# Altium PCB 333.PcbDoc (part 4 of 4)
Units mil, origin at the board's own origin, x right, y up, seen from the top; angles counter-clockwise.
Board outline 3897.64 x 5283.46 mil, 2 copper layers (Top Layer, Bottom Layer); 160 components, 17 nets, 480 pads, 300 vias.
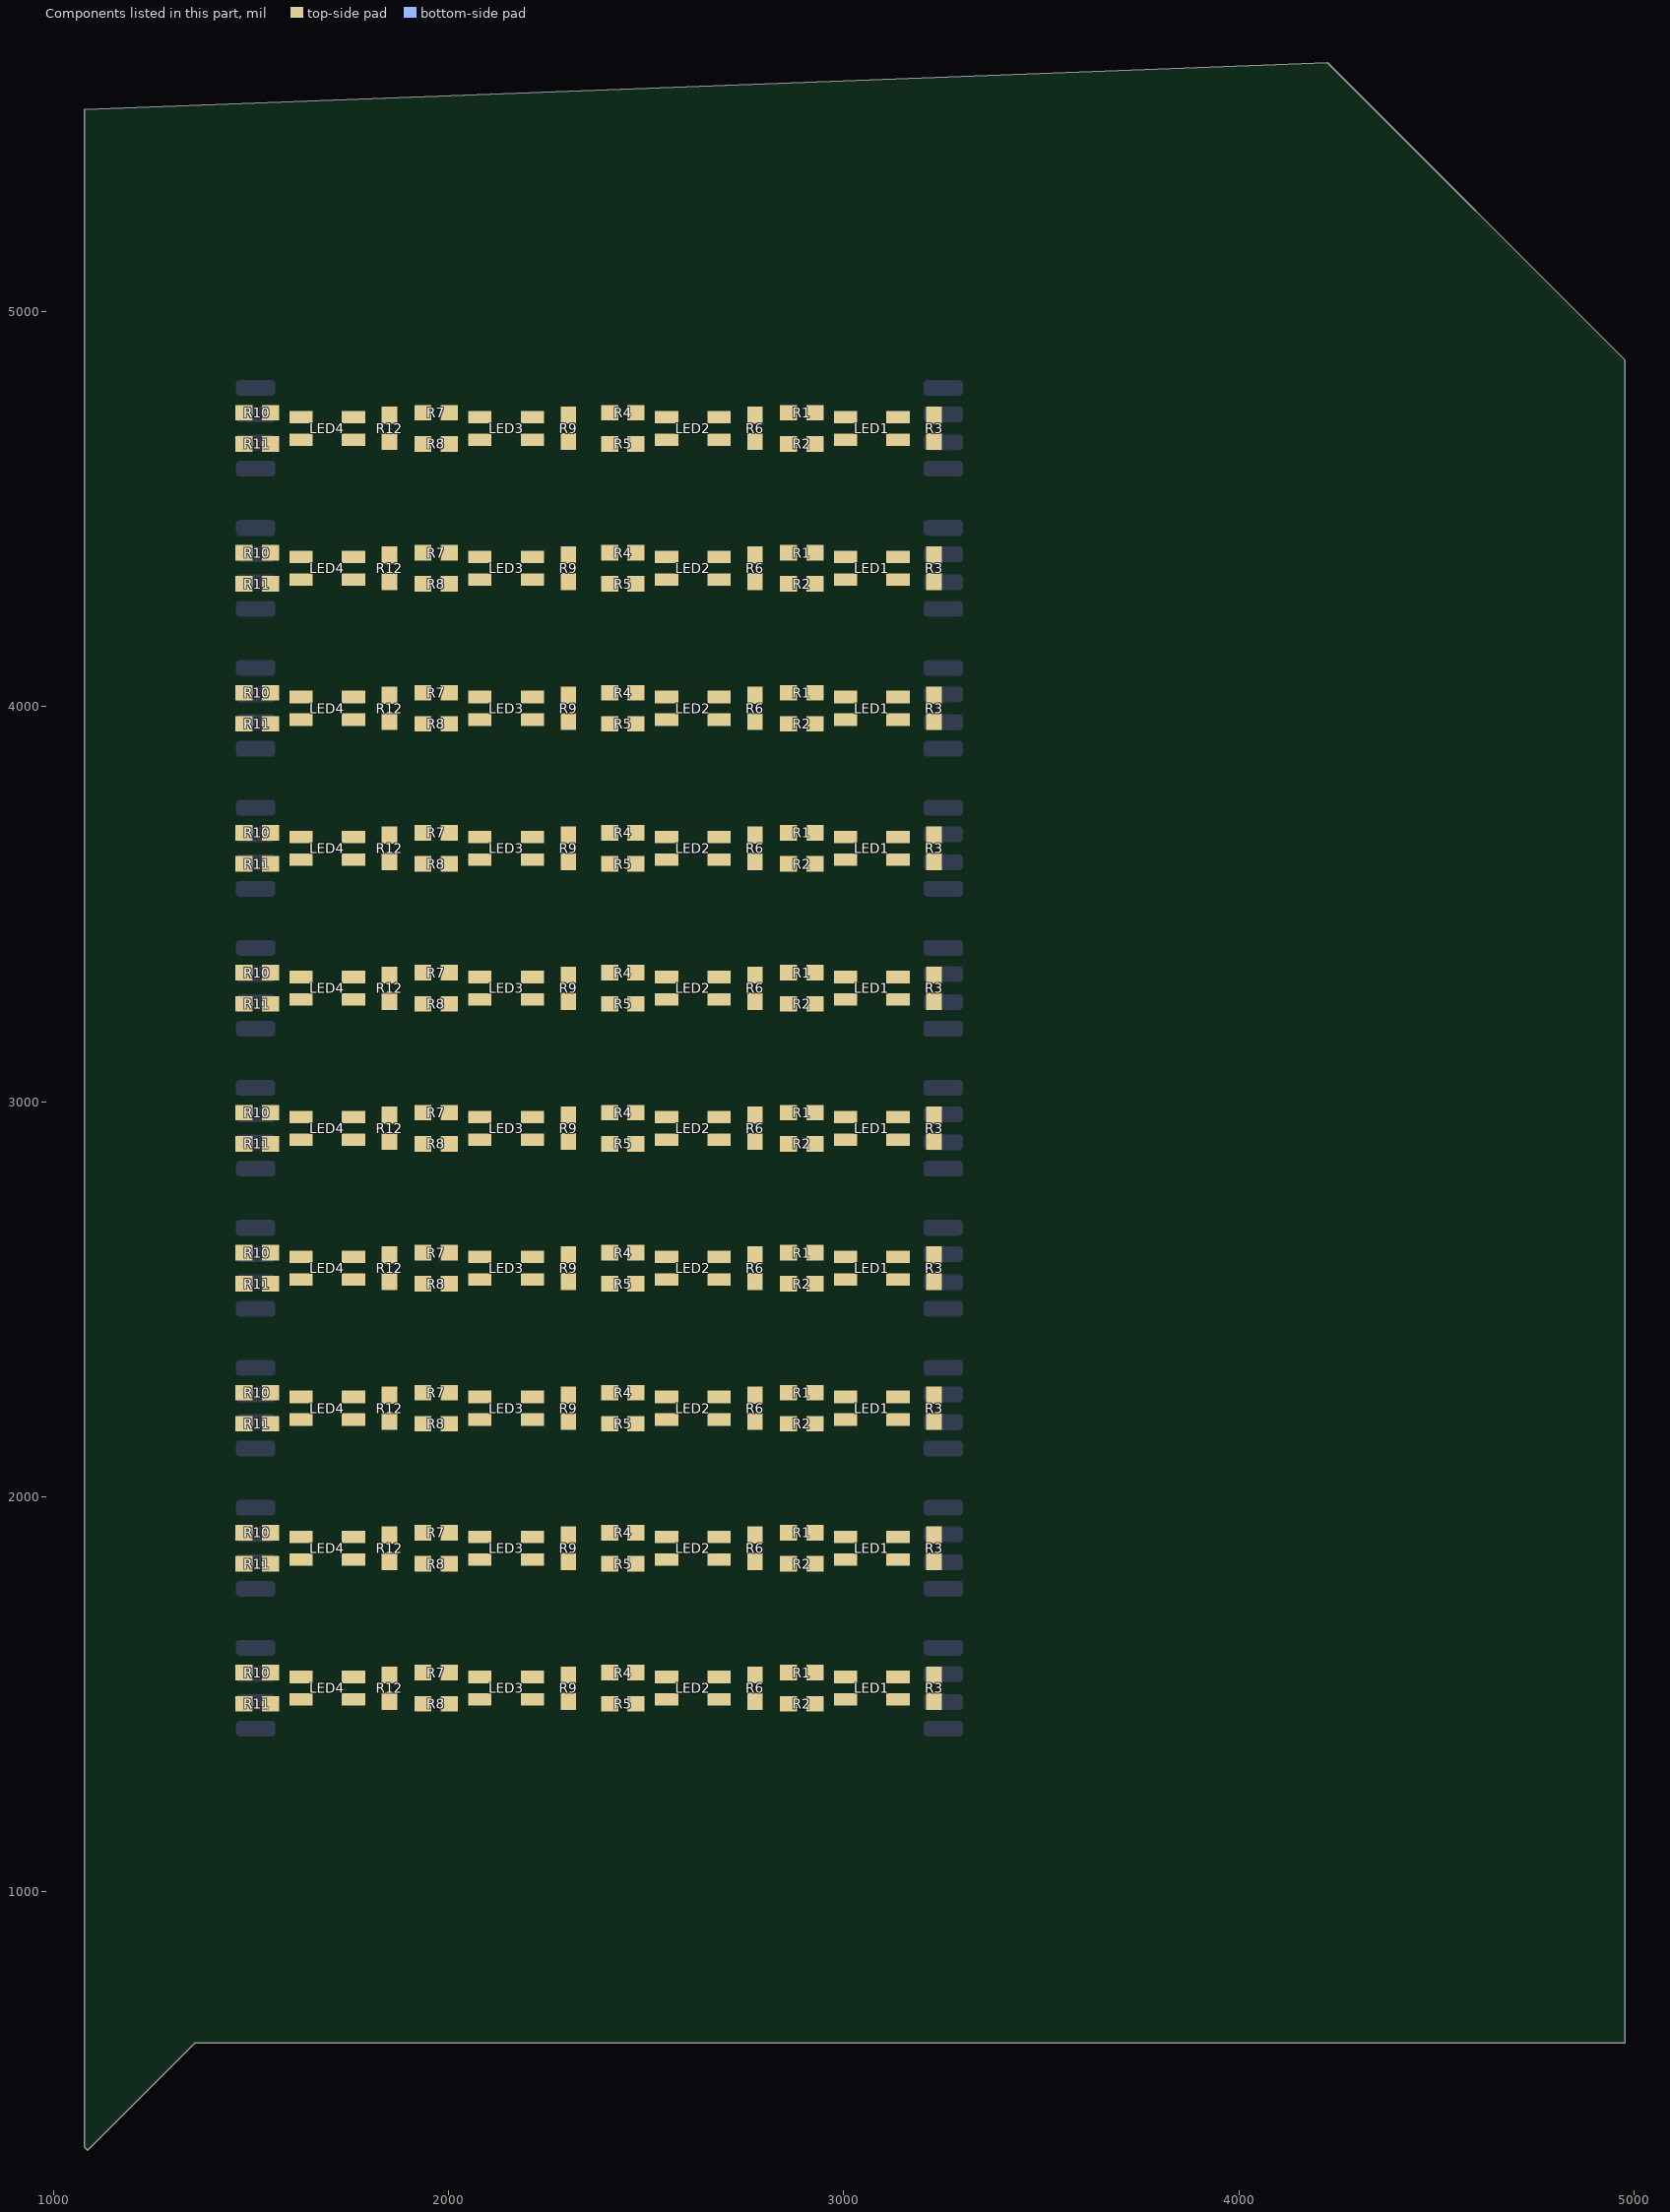
[diagram p4: the components of this part, seen from the top]

## Via types
v1: diameter 24, hole 12, Top Layer to Bottom Layer, 160 vias
v2: diameter 15, hole 15, Top Layer to Bottom Layer, 140 vias

## Nets (pads, with @x,y where several pads share a name; then routed paths per layer and width w, separated by ;. In a path a pad name is that pad's centre, name@x,y a point inside that pad or via, vN(x,y) a via of type N, cw(c..) or ccw(c..) an arc to the next point about the centre after c; other vN are vias at no path point) (continued)
copper on no net: (continued)
  Bottom Layer w20: 1481.81,1413.39 v1(1446.85,1446.85) 1480.32,1413.39 1511.81,1413.39 ; 1481.81,1551.18 v1(1446.85,1525.59) 1472.44,1551.18 1511.81,1551.18 1553.15,1551.18 1578.74,1525.59 ; 1481.81,2122.05 v1(1446.85,2155.51) 1480.32,2122.05 1511.81,2122.05 ; 1481.81,2259.84 v1(1446.85,2234.25) 1472.44,2259.84 1511.81,2259.84 1553.15,2259.84 1578.74,2234.25 ; 1481.81,2476.38 v1(1446.85,2509.84) 1480.32,2476.38 1511.81,2476.38 ; 1481.81,2614.17 v1(1446.85,2588.58) 1472.44,2614.17 1511.81,2614.17 1553.15,2614.17 1578.74,2588.58 ; 1481.81,2830.71 v1(1446.85,2864.17) 1480.32,2830.71 1511.81,2830.71 ; 1481.81,2968.5 v1(1446.85,2942.91) 1472.44,2968.5 1511.81,2968.5 1553.15,2968.5 1578.74,2942.91 ; 1481.81,3185.04 v1(1446.85,3218.5) 1480.32,3185.04 1511.81,3185.04 ; 1481.81,3322.83 v1(1446.85,3297.24) 1472.44,3322.83 1511.81,3322.83 1553.15,3322.83 1578.74,3297.24 ; 1481.81,3539.37 v1(1446.85,3572.83) 1480.32,3539.37 1511.81,3539.37 ; 1481.81,3677.17 v1(1446.85,3651.57) 1472.44,3677.17 1511.81,3677.17 1553.15,3677.17 1578.74,3651.57 ; 1481.81,3893.7 v1(1446.85,3927.17) 1480.32,3893.7 1511.81,3893.7 ; 1481.81,4031.5 v1(1446.85,4005.91) 1472.44,4031.5 1511.81,4031.5 1553.15,4031.5 1578.74,4005.91 ; 1481.81,4248.03 v1(1446.85,4281.5) 1480.32,4248.03 1511.81,4248.03 ; 1481.81,4385.83 v1(1446.85,4360.24) 1472.44,4385.83 1511.81,4385.83 1553.15,4385.83 1578.74,4360.24 ; 1481.81,4602.36 v1(1446.85,4635.83) 1480.32,4602.36 1511.81,4602.36 ; 1481.81,4740.16 v1(1446.85,4714.57) 1472.44,4740.16 1511.81,4740.16 1553.15,4740.16 1578.74,4714.57 ; 1511.81,1480.32 1574.8,1480.32 ; 1511.81,1618.11 1570.87,1618.11 ; 1511.81,2188.98 1574.8,2188.98 ; 1511.81,2326.77 1570.87,2326.77 ; 1511.81,2543.31 1574.8,2543.31 ; 1511.81,2681.1 1570.87,2681.1 ; 1511.81,2897.64 1574.8,2897.64 ; 1511.81,3035.43 1570.87,3035.43 ; 1511.81,3251.97 1574.8,3251.97 ; 1511.81,3389.76 1570.87,3389.76 ; 1511.81,3606.3 1574.8,3606.3 ; 1511.81,3744.09 1570.87,3744.09 ; 1511.81,3960.63 1574.8,3960.63 ; 1511.81,4098.43 1570.87,4098.43 ; 1511.81,4314.96 1574.8,4314.96 ; 1511.81,4452.76 1570.87,4452.76 ; 1511.81,4669.29 1574.8,4669.29 ; 1511.81,4807.09 1570.87,4807.09 ; 1539.37,1409.45 1576.77,1446.85 ; 1539.37,2118.11 1576.77,2155.51 ; 1539.37,2472.44 1576.77,2509.84 ; 1539.37,2826.77 1576.77,2864.17 ; 1539.37,3181.1 1576.77,3218.5 ; 1539.37,3535.43 1576.77,3572.83 ; 1539.37,3889.76 1576.77,3927.17 ; 1539.37,4244.09 1576.77,4281.5 ; 1539.37,4598.43 1576.77,4635.83 ; 1541.81,1413.39 1576.77,1446.85 ; 1541.81,1480.32 1574.8,1480.32 ; 1541.81,1551.18 1578.74,1525.59 ; 1541.81,2122.05 1576.77,2155.51 ; 1541.81,2188.98 1574.8,2188.98 ; 1541.81,2259.84 1578.74,2234.25 ; 1541.81,2476.38 1576.77,2509.84 ; 1541.81,2543.31 1574.8,2543.31 ; 1541.81,2614.17 1578.74,2588.58 ; 1541.81,2830.71 1576.77,2864.17 ; 1541.81,2897.64 1574.8,2897.64 ; 1541.81,2968.5 1578.74,2942.91 ; 1541.81,3185.04 1576.77,3218.5 ; 1541.81,3251.97 1574.8,3251.97 ; 1541.81,3322.83 1578.74,3297.24 ; 1541.81,3539.37 1576.77,3572.83 ; 1541.81,3606.3 1574.8,3606.3 ; 1541.81,3677.17 1578.74,3651.57 ; 1541.81,3893.7 1576.77,3927.17 ; 1541.81,3960.63 1574.8,3960.63 ; 1541.81,4031.5 1578.74,4005.91 ; 1541.81,4248.03 1576.77,4281.5 ; 1541.81,4314.96 1574.8,4314.96 ; 1541.81,4385.83 1578.74,4360.24 ; 1541.81,4602.36 1576.77,4635.83 ; 1541.81,4669.29 1574.8,4669.29 ; 1541.81,4740.16 1578.74,4714.57 ; 3194.71,1480.32 v1(3267.72,1486.22) 3251.97,1480.32 3188.98,1480.32 ; 3194.71,2188.98 v1(3267.72,2194.88) 3251.97,2188.98 3188.98,2188.98 ; 3194.71,2543.31 v1(3267.72,2549.21) 3251.97,2543.31 3188.98,2543.31 ; 3194.71,2897.64 v1(3267.72,2903.54) 3251.97,2897.64 3188.98,2897.64 ; 3194.71,3251.97 v1(3267.72,3257.87) 3251.97,3251.97 3188.98,3251.97 ; 3194.71,3606.3 v1(3267.72,3612.2) 3251.97,3606.3 3188.98,3606.3 ; 3194.71,3960.63 v1(3267.72,3966.54) 3251.97,3960.63 3188.98,3960.63 ; 3194.71,4314.96 v1(3267.72,4320.87) 3251.97,4314.96 3188.98,4314.96 ; 3194.71,4669.29 v1(3267.72,4675.2) 3251.97,4669.29 3188.98,4669.29 ; 3221.97,1480.32 3188.98,1480.32 ; 3221.97,2188.98 3188.98,2188.98 ; 3221.97,2543.31 3188.98,2543.31 ; 3221.97,2897.64 3188.98,2897.64 ; 3221.97,3251.97 3188.98,3251.97 ; 3221.97,3606.3 3188.98,3606.3 ; 3221.97,3960.63 3188.98,3960.63 ; 3221.97,4314.96 3188.98,4314.96 ; 3221.97,4669.29 3188.98,4669.29 ; 3251.97,1413.39 3196.85,1413.39 ; 3251.97,1551.18 3196.85,1551.18 ; 3251.97,1618.11 3192.91,1618.11 ; 3251.97,2122.05 3196.85,2122.05 ; 3251.97,2259.84 3196.85,2259.84 ; 3251.97,2326.77 3192.91,2326.77 ; 3251.97,2476.38 3196.85,2476.38 ; 3251.97,2614.17 3196.85,2614.17 ; 3251.97,2681.1 3192.91,2681.1 ; 3251.97,2830.71 3196.85,2830.71 ; 3251.97,2968.5 3196.85,2968.5 ; 3251.97,3035.43 3192.91,3035.43 ; 3251.97,3185.04 3196.85,3185.04 ; 3251.97,3322.83 3196.85,3322.83 ; 3251.97,3389.76 3192.91,3389.76 ; 3251.97,3539.37 3196.85,3539.37 ; 3251.97,3677.17 3196.85,3677.17 ; 3251.97,3744.09 3192.91,3744.09 ; 3251.97,3893.7 3196.85,3893.7 ; 3251.97,4031.5 3196.85,4031.5 ; 3251.97,4098.43 3192.91,4098.43 ; 3251.97,4248.03 3196.85,4248.03 ; 3251.97,4385.83 3196.85,4385.83 ; 3251.97,4452.76 3192.91,4452.76 ; 3251.97,4602.36 3196.85,4602.36 ; 3251.97,4740.16 3196.85,4740.16 ; 3251.97,4807.09 3192.91,4807.09 ; 1541.81,1618.11 1570.87,1618.11 ; 1541.81,1618.11 1614.17,1574.8 ; 1541.81,1618.11 1570.87,1618.11 ; 1541.81,2326.77 1570.87,2326.77 ; 1541.81,2326.77 1614.17,2283.46 ; 1541.81,2326.77 1570.87,2326.77 ; 1541.81,2681.1 1570.87,2681.1 ; 1541.81,2681.1 1614.17,2637.8 ; 1541.81,2681.1 1570.87,2681.1 ; 1541.81,3035.43 1570.87,3035.43 ; 1541.81,3035.43 1614.17,2992.13 ; 1541.81,3035.43 1570.87,3035.43 ; 1541.81,3389.76 1570.87,3389.76 ; 1541.81,3389.76 1614.17,3346.46 ; 1541.81,3389.76 1570.87,3389.76 ; 1541.81,3744.09 1570.87,3744.09 ; 1541.81,3744.09 1614.17,3700.79 ; 1541.81,3744.09 1570.87,3744.09 ; 1541.81,4098.43 1570.87,4098.43 ; 1541.81,4098.43 1614.17,4055.12 ; 1541.81,4098.43 1570.87,4098.43 ; 1541.81,4452.76 1570.87,4452.76 ; 1541.81,4452.76 1614.17,4409.45 ; 1541.81,4452.76 1570.87,4452.76 ; 1541.81,4807.09 1570.87,4807.09 ; 1541.81,4807.09 1614.17,4763.78 ; 1541.81,4807.09 1570.87,4807.09 ; 1570.87,1618.11 1614.17,1574.8 ; 1570.87,2326.77 1614.17,2283.46 ; 1570.87,2681.1 1614.17,2637.8 ; 1570.87,3035.43 1614.17,2992.13 ; 1570.87,3389.76 1614.17,3346.46 ; 1570.87,3744.09 1614.17,3700.79 ; 1570.87,4098.43 1614.17,4055.12 ; 1570.87,4452.76 1614.17,4409.45 ; 1570.87,4807.09 1614.17,4763.78 ; 1574.8,1480.32 1580.71,1486.22 v1(1889.76,1486.22) v1(2342.52,1486.22) v1(2814.96,1486.22) 3183.07,1486.22 3188.98,1480.32 ; 1574.8,2188.98 1580.71,2194.88 v1(1889.76,2194.88) v1(2342.52,2194.88) v1(2814.96,2194.88) 3183.07,2194.88 3188.98,2188.98 ; 1574.8,2543.31 1580.71,2549.21 v1(1889.76,2549.21) v1(2342.52,2549.21) v1(2814.96,2549.21) 3183.07,2549.21 3188.98,2543.31 ; 1574.8,2897.64 1580.71,2903.54 v1(1889.76,2903.54) v1(2342.52,2903.54) v1(2814.96,2903.54) 3183.07,2903.54 3188.98,2897.64 ; 1574.8,3251.97 1580.71,3257.87 v1(1889.76,3257.87) v1(2342.52,3257.87) v1(2814.96,3257.87) 3183.07,3257.87 3188.98,3251.97 ; 1574.8,3606.3 1580.71,3612.2 v1(1889.76,3612.2) v1(2342.52,3612.2) v1(2814.96,3612.2) 3183.07,3612.2 3188.98,3606.3 ; 1574.8,3960.63 1580.71,3966.54 v1(1889.76,3966.54) v1(2342.52,3966.54) v1(2814.96,3966.54) 3183.07,3966.54 3188.98,3960.63 ; 1574.8,4314.96 1580.71,4320.87 v1(1889.76,4320.87) v1(2342.52,4320.87) v1(2814.96,4320.87) 3183.07,4320.87 3188.98,4314.96 ; 1574.8,4669.29 1580.71,4675.2 v1(1889.76,4675.2) v1(2342.52,4675.2) v1(2814.96,4675.2) 3183.07,4675.2 3188.98,4669.29 ; 1576.77,1446.85 v1(1899.61,1446.85) v1(2372.05,1446.85) v1(2824.8,1446.85) 3163.39,1446.85 ; 1576.77,2155.51 v1(1899.61,2155.51) v1(2372.05,2155.51) v1(2824.8,2155.51) 3163.39,2155.51 ; 1576.77,2509.84 v1(1899.61,2509.84) v1(2372.05,2509.84) v1(2824.8,2509.84) 3163.39,2509.84 ; 1576.77,2864.17 v1(1899.61,2864.17) v1(2372.05,2864.17) v1(2824.8,2864.17) 3163.39,2864.17 ; 1576.77,3218.5 v1(1899.61,3218.5) v1(2372.05,3218.5) v1(2824.8,3218.5) 3163.39,3218.5 ; 1576.77,3572.83 v1(1899.61,3572.83) v1(2372.05,3572.83) v1(2824.8,3572.83) 3163.39,3572.83 ; 1576.77,3927.17 v1(1899.61,3927.17) v1(2372.05,3927.17) v1(2824.8,3927.17) 3163.39,3927.17 ; 1576.77,4281.5 v1(1899.61,4281.5) v1(2372.05,4281.5) v1(2824.8,4281.5) 3163.39,4281.5 ; 1576.77,4635.83 v1(1899.61,4635.83) v1(2372.05,4635.83) v1(2824.8,4635.83) 3163.39,4635.83 ; 1578.74,1525.59 v1(1899.61,1525.59) v1(2372.05,1525.59) v1(2824.8,1525.59) 3171.26,1525.59 ; 1578.74,2234.25 v1(1899.61,2234.25) v1(2372.05,2234.25) v1(2824.8,2234.25) 3171.26,2234.25 ; 1578.74,2588.58 v1(1899.61,2588.58) v1(2372.05,2588.58) v1(2824.8,2588.58) 3171.26,2588.58 ; 1578.74,2942.91 v1(1899.61,2942.91) v1(2372.05,2942.91) v1(2824.8,2942.91) 3171.26,2942.91 ; 1578.74,3297.24 v1(1899.61,3297.24) v1(2372.05,3297.24) v1(2824.8,3297.24) 3171.26,3297.24 ; 1578.74,3651.57 v1(1899.61,3651.57) v1(2372.05,3651.57) v1(2824.8,3651.57) 3171.26,3651.57 ; 1578.74,4005.91 v1(1899.61,4005.91) v1(2372.05,4005.91) v1(2824.8,4005.91) 3171.26,4005.91 ; 1578.74,4360.24 v1(1899.61,4360.24) v1(2372.05,4360.24) v1(2824.8,4360.24) 3171.26,4360.24 ; 1578.74,4714.57 v1(1899.61,4714.57) v1(2372.05,4714.57) v1(2824.8,4714.57) 3171.26,4714.57 ; 1614.17,1574.8 v1(1702.76,1574.8) v1(2155.51,1574.8) v1(2627.95,1574.8) v1(3080.71,1574.8) 3149.61,1574.8 ; 1614.17,2283.46 v1(1702.76,2283.46) v1(2155.51,2283.46) v1(2627.95,2283.46) v1(3080.71,2283.46) 3149.61,2283.46 ; 1614.17,2637.8 v1(1702.76,2637.8) v1(2155.51,2637.8) v1(2627.95,2637.8) v1(3080.71,2637.8) 3149.61,2637.8 ; 1614.17,2992.13 v1(1702.76,2992.13) v1(2155.51,2992.13) v1(2627.95,2992.13) v1(3080.71,2992.13) 3149.61,2992.13 ; 1614.17,3346.46 v1(1702.76,3346.46) v1(2155.51,3346.46) v1(2627.95,3346.46) v1(3080.71,3346.46) 3149.61,3346.46 ; 1614.17,3700.79 v1(1702.76,3700.79) v1(2155.51,3700.79) v1(2627.95,3700.79) v1(3080.71,3700.79) 3149.61,3700.79 ; 1614.17,4055.12 v1(1702.76,4055.12) v1(2155.51,4055.12) v1(2627.95,4055.12) v1(3080.71,4055.12) 3149.61,4055.12 ; 1614.17,4409.45 v1(1702.76,4409.45) v1(2155.51,4409.45) v1(2627.95,4409.45) v1(3080.71,4409.45) 3149.61,4409.45 ; 1614.17,4763.78 v1(1702.76,4763.78) v1(2155.51,4763.78) v1(2627.95,4763.78) v1(3080.71,4763.78) 3149.61,4763.78 ; 3149.61,1574.8 3192.91,1618.11 ; 3149.61,1574.8 3221.97,1618.11 ; 3149.61,2283.46 3221.97,2326.77 ; 3149.61,2283.46 3192.91,2326.77 ; 3149.61,2637.8 3192.91,2681.1 ; 3149.61,2637.8 3221.97,2681.1 ; 3149.61,2992.13 3221.97,3035.43 ; 3149.61,2992.13 3192.91,3035.43 ; 3149.61,3346.46 3192.91,3389.76 ; 3149.61,3346.46 3221.97,3389.76 ; 3149.61,3700.79 3192.91,3744.09 ; 3149.61,3700.79 3221.97,3744.09 ; 3149.61,4055.12 3221.97,4098.43 ; 3149.61,4055.12 3192.91,4098.43 ; 3149.61,4409.45 3221.97,4452.76 ; 3149.61,4409.45 3192.91,4452.76 ; 3149.61,4763.78 3192.91,4807.09 ; 3149.61,4763.78 3221.97,4807.09 ; 3163.39,1446.85 3196.85,1413.39 ; 3163.39,1446.85 3221.97,1413.39 ; 3163.39,2155.51 3221.97,2122.05 ; 3163.39,2155.51 3196.85,2122.05 ; 3163.39,2509.84 3196.85,2476.38 ; 3163.39,2509.84 3221.97,2476.38 ; 3163.39,2864.17 3221.97,2830.71 ; 3163.39,2864.17 3196.85,2830.71 ; 3163.39,3218.5 3196.85,3185.04 ; 3163.39,3218.5 3221.97,3185.04 ; 3163.39,3572.83 3196.85,3539.37 ; 3163.39,3572.83 3221.97,3539.37 ; 3163.39,3927.17 3221.97,3893.7 ; 3163.39,3927.17 3196.85,3893.7 ; 3163.39,4281.5 3221.97,4248.03 ; 3163.39,4281.5 3196.85,4248.03 ; 3163.39,4635.83 3196.85,4602.36 ; 3163.39,4635.83 3221.97,4602.36 ; 3171.26,1525.59 3196.85,1551.18 ; 3171.26,1525.59 3221.97,1551.18 ; 3171.26,2234.25 3221.97,2259.84 ; 3171.26,2234.25 3196.85,2259.84 ; 3171.26,2588.58 3196.85,2614.17 ; 3171.26,2588.58 3221.97,2614.17 ; 3171.26,2942.91 3221.97,2968.5 ; 3171.26,2942.91 3196.85,2968.5 ; 3171.26,3297.24 3196.85,3322.83 ; 3171.26,3297.24 3221.97,3322.83 ; 3171.26,3651.57 3196.85,3677.17 ; 3171.26,3651.57 3221.97,3677.17 ; 3171.26,4005.91 3221.97,4031.5 ; 3171.26,4005.91 3196.85,4031.5 ; 3171.26,4360.24 3221.97,4385.83 ; 3171.26,4360.24 3196.85,4385.83 ; 3171.26,4714.57 3196.85,4740.16 ; 3171.26,4714.57 3221.97,4740.16 ; 3192.91,1618.11 3221.97,1618.11 ; 3192.91,1618.11 3221.97,1618.11 ; 3192.91,2326.77 3221.97,2326.77 ; 3192.91,2326.77 3221.97,2326.77 ; 3192.91,2681.1 3221.97,2681.1 ; 3192.91,2681.1 3221.97,2681.1 ; 3192.91,3035.43 3221.97,3035.43 ; 3192.91,3035.43 3221.97,3035.43 ; 3192.91,3389.76 3221.97,3389.76 ; 3192.91,3389.76 3221.97,3389.76 ; 3192.91,3744.09 3221.97,3744.09 ; 3192.91,3744.09 3221.97,3744.09 ; 3192.91,4098.43 3221.97,4098.43 ; 3192.91,4098.43 3221.97,4098.43 ; 3192.91,4452.76 3221.97,4452.76 ; 3192.91,4452.76 3221.97,4452.76 ; 3192.91,4807.09 3221.97,4807.09 ; 3192.91,4807.09 3221.97,4807.09 ; 3196.85,1413.39 3221.97,1413.39 ; 3196.85,1413.39 3221.97,1413.39 ; 3196.85,1551.18 3221.97,1551.18 ; 3196.85,1551.18 3221.97,1551.18 ; 3196.85,2122.05 3221.97,2122.05 ; 3196.85,2122.05 3221.97,2122.05 ; 3196.85,2259.84 3221.97,2259.84 ; 3196.85,2259.84 3221.97,2259.84 ; 3196.85,2476.38 3221.97,2476.38 ; 3196.85,2476.38 3221.97,2476.38 ; 3196.85,2614.17 3221.97,2614.17 ; 3196.85,2614.17 3221.97,2614.17 ; 3196.85,2830.71 3221.97,2830.71 ; 3196.85,2830.71 3221.97,2830.71 ; 3196.85,2968.5 3221.97,2968.5 ; 3196.85,2968.5 3221.97,2968.5 ; 3196.85,3185.04 3221.97,3185.04 ; 3196.85,3185.04 3221.97,3185.04 ; 3196.85,3322.83 3221.97,3322.83 ; 3196.85,3322.83 3221.97,3322.83 ; 3196.85,3539.37 3221.97,3539.37 ; 3196.85,3539.37 3221.97,3539.37 ; 3196.85,3677.17 3221.97,3677.17 ; 3196.85,3677.17 3221.97,3677.17 ; 3196.85,3893.7 3221.97,3893.7 ; 3196.85,3893.7 3221.97,3893.7 ; 3196.85,4031.5 3221.97,4031.5 ; 3196.85,4031.5 3221.97,4031.5 ; 3196.85,4248.03 3221.97,4248.03 ; 3196.85,4248.03 3221.97,4248.03 ; 3196.85,4385.83 3221.97,4385.83 ; 3196.85,4385.83 3221.97,4385.83 ; 3196.85,4602.36 3221.97,4602.36 ; 3196.85,4602.36 3221.97,4602.36 ; 3196.85,4740.16 3221.97,4740.16 ; 3196.85,4740.16 3221.97,4740.16
  other v2: 1417.32,1456.69 3346.46,1456.69 1417.32,1476.38 3346.46,1476.38 1417.32,1496.06 3346.46,1496.06 1417.32,1515.75 3346.46,1515.75 1417.32,1535.43 3346.46,1535.43 1417.32,1555.12 3346.46,1555.12 1417.32,1574.8 3346.46,1574.8 1417.32,1811.02 3346.46,1811.02 1417.32,1830.71 3346.46,1830.71 1417.32,1850.39 3346.46,1850.39 1417.32,1870.08 3346.46,1870.08 1417.32,1889.76 3346.46,1889.76 1417.32,1909.45 3346.46,1909.45 1417.32,1929.13 3346.46,1929.13 1417.32,2165.35 3346.46,2165.35 1417.32,2185.04 3346.46,2185.04 1417.32,2204.72 3346.46,2204.72 1417.32,2224.41 3346.46,2224.41 1417.32,2244.09 3346.46,2244.09 1417.32,2263.78 3346.46,2263.78 1417.32,2283.46 3346.46,2283.46 1417.32,2519.69 3346.46,2519.68 1417.32,2539.37 3346.46,2539.37 1417.32,2559.06 3346.46,2559.06 1417.32,2578.74 3346.46,2578.74 1417.32,2598.43 3346.46,2598.43 1417.32,2618.11 3346.46,2618.11 1417.32,2637.8 3346.46,2637.8 1417.32,2874.02 3346.46,2874.02 1417.32,2893.7 3346.46,2893.7 1417.32,2913.39 3346.46,2913.39 1417.32,2933.07 3346.46,2933.07 1417.32,2952.76 3346.46,2952.76 1417.32,2972.44 3346.46,2972.44 1417.32,2992.13 3346.46,2992.13 1417.32,3228.35 3346.46,3228.35 1417.32,3248.03 3346.46,3248.03 1417.32,3267.72 3346.46,3267.72 1417.32,3287.4 3346.46,3287.4 1417.32,3307.09 3346.46,3307.09 1417.32,3326.77 3346.46,3326.77 1417.32,3346.46 3346.46,3346.46 1417.32,3582.68 3346.46,3582.68 1417.32,3602.36 3346.46,3602.36 1417.32,3622.05 3346.46,3622.05 1417.32,3641.73 3346.46,3641.73 1417.32,3661.42 3346.46,3661.42 1417.32,3681.1 3346.46,3681.1 1417.32,3700.79 3346.46,3700.79 1417.32,3937.01 3346.46,3937.01 1417.32,3956.69 3346.46,3956.69 1417.32,3976.38 3346.46,3976.38 1417.32,3996.06 3346.46,3996.06 1417.32,4015.75 3346.46,4015.75 1417.32,4035.43 3346.46,4035.43 1417.32,4055.12 3346.46,4055.12 1417.32,4291.34 3346.46,4291.34 1417.32,4311.02 3346.46,4311.02 1417.32,4330.71 3346.46,4330.71 1417.32,4350.39 3346.46,4350.39 1417.32,4370.08 3346.46,4370.08 1417.32,4389.76 3346.46,4389.76 1417.32,4409.45 3346.46,4409.45 1417.32,4645.67 3346.46,4645.67 1417.32,4665.35 3346.46,4665.35 1417.32,4685.04 3346.46,4685.04 1417.32,4704.72 3346.46,4704.72 1417.32,4724.41 3346.46,4724.41 1417.32,4744.09 3346.46,4744.09 1417.32,4763.78 3346.46,4763.78

## Keep-outs
Keep-Out Layer:
  lines w10: 1259.84,1259.84 1259.84,1338.58 1259.84,4960.63 3503.94,4960.63 3503.94,1259.84 3484.25,1259.84 1259.84,1259.84 ; 1358.27,1338.58 1358.27,1456.69 1417.32,1456.69 1417.32,1377.95 1574.8,1377.95 1614.17,1417.32 3149.61,1417.32 3188.98,1377.95 3346.46,1377.95 3346.46,1456.69 3405.51,1456.69 3405.51,1338.58 1358.27,1338.58 ; 1358.27,1574.8 1358.27,1692.91 1358.27,1811.02 1417.32,1811.02 1417.32,1732.28 1574.8,1732.28 1614.17,1771.65 3149.61,1771.65 3188.98,1732.28 3346.46,1732.28 3346.46,1811.02 3405.51,1811.02 3405.51,1692.91 3405.51,1574.8 3346.46,1574.8 3346.46,1653.54 3188.98,1653.54 3149.61,1614.17 1614.17,1614.17 1574.8,1653.54 1417.32,1653.54 1417.32,1574.8 1358.27,1574.8 ; 1358.27,1929.13 1358.27,2047.24 1358.27,2165.35 1417.32,2165.35 1417.32,2086.61 1574.8,2086.61 1614.17,2125.98 3149.61,2125.98 3188.98,2086.61 3346.46,2086.61 3346.46,2165.35 3405.51,2165.35 3405.51,2047.24 3405.51,1929.13 3346.46,1929.13 3346.46,2007.87 3188.98,2007.87 3149.61,1968.5 1614.17,1968.5 1574.8,2007.87 1417.32,2007.87 1417.32,1929.13 1358.27,1929.13 ; 1358.27,2283.46 1358.27,2401.57 1358.27,2519.69 1417.32,2519.69 1417.32,2440.94 1574.8,2440.94 1614.17,2480.32 3149.61,2480.32 3188.98,2440.94 3346.46,2440.94 3346.46,2519.68 3405.51,2519.68 3405.51,2401.57 3405.51,2283.46 3346.46,2283.46 3346.46,2362.2 3188.98,2362.2 3149.61,2322.83 1614.17,2322.83 1574.8,2362.2 1417.32,2362.2 1417.32,2283.46 1358.27,2283.46 ; 1358.27,2637.8 1358.27,2755.91 1358.27,2874.02 1417.32,2874.02 1417.32,2795.28 1574.8,2795.28 1614.17,2834.65 3149.61,2834.65 3188.98,2795.28 3346.46,2795.28 3346.46,2874.02 3405.51,2874.02 3405.51,2755.91 3405.51,2637.8 3346.46,2637.8 3346.46,2716.54 3188.98,2716.54 3149.61,2677.17 1614.17,2677.17 1574.8,2716.54 1417.32,2716.54 1417.32,2637.8 1358.27,2637.8 ; 1358.27,2992.13 1358.27,3110.24 1358.27,3228.35 1417.32,3228.35 1417.32,3149.61 1574.8,3149.61 1614.17,3188.98 3149.61,3188.98 3188.98,3149.61 3346.46,3149.61 3346.46,3228.35 3405.51,3228.35 3405.51,3110.24 3405.51,2992.13 3346.46,2992.13 3346.46,3070.87 3188.98,3070.87 3149.61,3031.5 1614.17,3031.5 1574.8,3070.87 1417.32,3070.87 1417.32,2992.13 1358.27,2992.13 ; 1358.27,3346.46 1358.27,3464.57 1358.27,3582.68 1417.32,3582.68 1417.32,3503.94 1574.8,3503.94 1614.17,3543.31 3149.61,3543.31 3188.98,3503.94 3346.46,3503.94 3346.46,3582.68 3405.51,3582.68 3405.51,3464.57 3405.51,3346.46 3346.46,3346.46 3346.46,3425.2 3188.98,3425.2 3149.61,3385.83 1614.17,3385.83 1574.8,3425.2 1417.32,3425.2 1417.32,3346.46 1358.27,3346.46 ; 1358.27,3700.79 1358.27,3818.9 1358.27,3937.01 1417.32,3937.01 1417.32,3858.27 1574.8,3858.27 1614.17,3897.64 3149.61,3897.64 3188.98,3858.27 3346.46,3858.27 3346.46,3937.01 3405.51,3937.01 3405.51,3818.9 3405.51,3700.79 3346.46,3700.79 3346.46,3779.53 3188.98,3779.53 3149.61,3740.16 1614.17,3740.16 1574.8,3779.53 1417.32,3779.53 1417.32,3700.79 1358.27,3700.79 ; 1358.27,4055.12 1358.27,4173.23 1358.27,4291.34 1417.32,4291.34 1417.32,4212.6 1574.8,4212.6 1614.17,4251.97 3149.61,4251.97 3188.98,4212.6 3346.46,4212.6 3346.46,4291.34 3405.51,4291.34 3405.51,4173.23 3405.51,4055.12 3346.46,4055.12 3346.46,4133.86 3188.98,4133.86 3149.61,4094.49 1614.17,4094.49 1574.8,4133.86 1417.32,4133.86 1417.32,4055.12 1358.27,4055.12 ; 1358.27,4409.45 1358.27,4527.56 1358.27,4645.67 1417.32,4645.67 1417.32,4566.93 1574.8,4566.93 1614.17,4606.3 3149.61,4606.3 3188.98,4566.93 3346.46,4566.93 3346.46,4645.67 3405.51,4645.67 3405.51,4527.56 3405.51,4409.45 3346.46,4409.45 3346.46,4488.19 3188.98,4488.19 3149.61,4448.82 1614.17,4448.82 1574.8,4488.19 1417.32,4488.19 1417.32,4409.45 1358.27,4409.45 ; 1358.27,4763.78 1417.32,4763.78 1417.32,4842.52 1574.8,4842.52 1614.17,4803.15 3149.61,4803.15 3188.98,4842.52 3346.46,4842.52 3346.46,4763.78 3405.51,4763.78 3405.51,4881.89 1358.27,4881.89 1358.27,4763.78

## Silkscreen, mask and mechanical layers (free items; w line width, h text height)
Top Overlay:
  text "JICJICJICJIC" at 1322.83,2972.44 h40 r90
Bottom Overlay:
  text "+" at 1629.92,4755.91 h40
  text "+" at 3114.17,4755.91 h40
  text "R" at 1622.05,4740.16 h40 r270
  text "R" at 3106.3,4740.16 h40 r270
  text "B" at 1622.05,4692.91 h40 r270
  text "B" at 3106.3,4692.91 h40 r270
  text "G" at 1622.05,4645.67 h40 r270
  text "G" at 3106.3,4645.67 h40 r270
  text "+" at 1629.92,4401.57 h40
  text "+" at 3114.17,4401.57 h40
  text "R" at 1622.05,4385.83 h40 r270
  text "R" at 3106.3,4385.83 h40 r270
  text "B" at 1622.05,4338.58 h40 r270
  text "B" at 3106.3,4338.58 h40 r270
  text "G" at 1622.05,4291.34 h40 r270
  text "G" at 3106.3,4291.34 h40 r270
  text "+" at 1629.92,4047.24 h40
  text "+" at 3114.17,4047.24 h40
  text "R" at 1622.05,4031.5 h40 r270
  text "R" at 3106.3,4031.5 h40 r270
  text "B" at 1622.05,3984.25 h40 r270
  text "B" at 3106.3,3984.25 h40 r270
  text "G" at 1622.05,3937.01 h40 r270
  text "G" at 3106.3,3937.01 h40 r270
  text "+" at 1629.92,3692.91 h40
  text "+" at 3114.17,3692.91 h40
  text "R" at 1622.05,3677.17 h40 r270
  text "R" at 3106.3,3677.17 h40 r270
  text "B" at 1622.05,3629.92 h40 r270
  text "B" at 3106.3,3629.92 h40 r270
  text "G" at 1622.05,3582.68 h40 r270
  text "G" at 3106.3,3582.68 h40 r270
  text "+" at 1629.92,3338.58 h40
  text "+" at 3114.17,3338.58 h40
  text "R" at 1622.05,3322.83 h40 r270
  text "R" at 3106.3,3322.83 h40 r270
  text "B" at 1622.05,3275.59 h40 r270
  text "B" at 3106.3,3275.59 h40 r270
  text "G" at 1622.05,3228.35 h40 r270
  text "G" at 3106.3,3228.35 h40 r270
  text "+" at 1629.92,2984.25 h40
  text "+" at 3114.17,2984.25 h40
  text "R" at 1622.05,2968.5 h40 r270
  text "R" at 3106.3,2968.5 h40 r270
  text "B" at 1622.05,2921.26 h40 r270
  text "B" at 3106.3,2921.26 h40 r270
  text "G" at 1622.05,2874.02 h40 r270
  text "G" at 3106.3,2874.02 h40 r270
  text "+" at 1629.92,2629.92 h40
  text "+" at 3114.17,2629.92 h40
  text "R" at 1622.05,2614.17 h40 r270
  text "R" at 3106.3,2614.17 h40 r270
  text "B" at 1622.05,2566.93 h40 r270
  text "B" at 3106.3,2566.93 h40 r270
  text "G" at 1622.05,2519.68 h40 r270
  text "G" at 3106.3,2519.68 h40 r270
  text "+" at 1629.92,2275.59 h40
  text "+" at 3114.17,2275.59 h40
  text "R" at 1622.05,2259.84 h40 r270
  text "R" at 3106.3,2259.84 h40 r270
  text "B" at 1622.05,2212.6 h40 r270
  text "B" at 3106.3,2212.6 h40 r270
  text "G" at 1622.05,2165.35 h40 r270
  text "G" at 3106.3,2165.35 h40 r270
  text "+" at 1629.92,1921.26 h40
  text "+" at 3114.17,1921.26 h40
  text "R" at 1622.05,1905.51 h40 r270
  text "R" at 3106.3,1905.51 h40 r270
  text "B" at 1622.05,1858.27 h40 r270
  text "B" at 3106.3,1858.27 h40 r270
  text "G" at 1622.05,1811.02 h40 r270
  text "G" at 3106.3,1811.02 h40 r270
  text "+" at 1629.92,1566.93 h40
  text "+" at 3114.17,1566.93 h40
  text "R" at 1622.05,1551.18 h40 r270
  text "R" at 3106.3,1551.18 h40 r270
  text "B" at 1622.05,1503.94 h40 r270
  text "B" at 3106.3,1503.94 h40 r270
  text "G" at 1622.05,1456.69 h40 r270
  text "G" at 3106.3,1456.69 h40 r270